# Altium PCB SMC_V1.PcbDoc
Units mil, origin at the board's own origin, x right, y up, seen from the top; angles counter-clockwise.
Board outline 5860.03 x 3310.03 mil, 2 copper layers (Top Layer, Bottom Layer); 126 components, 164 nets, 428 pads, 102 vias.
Unrouted connection lines stored in the file: 6.
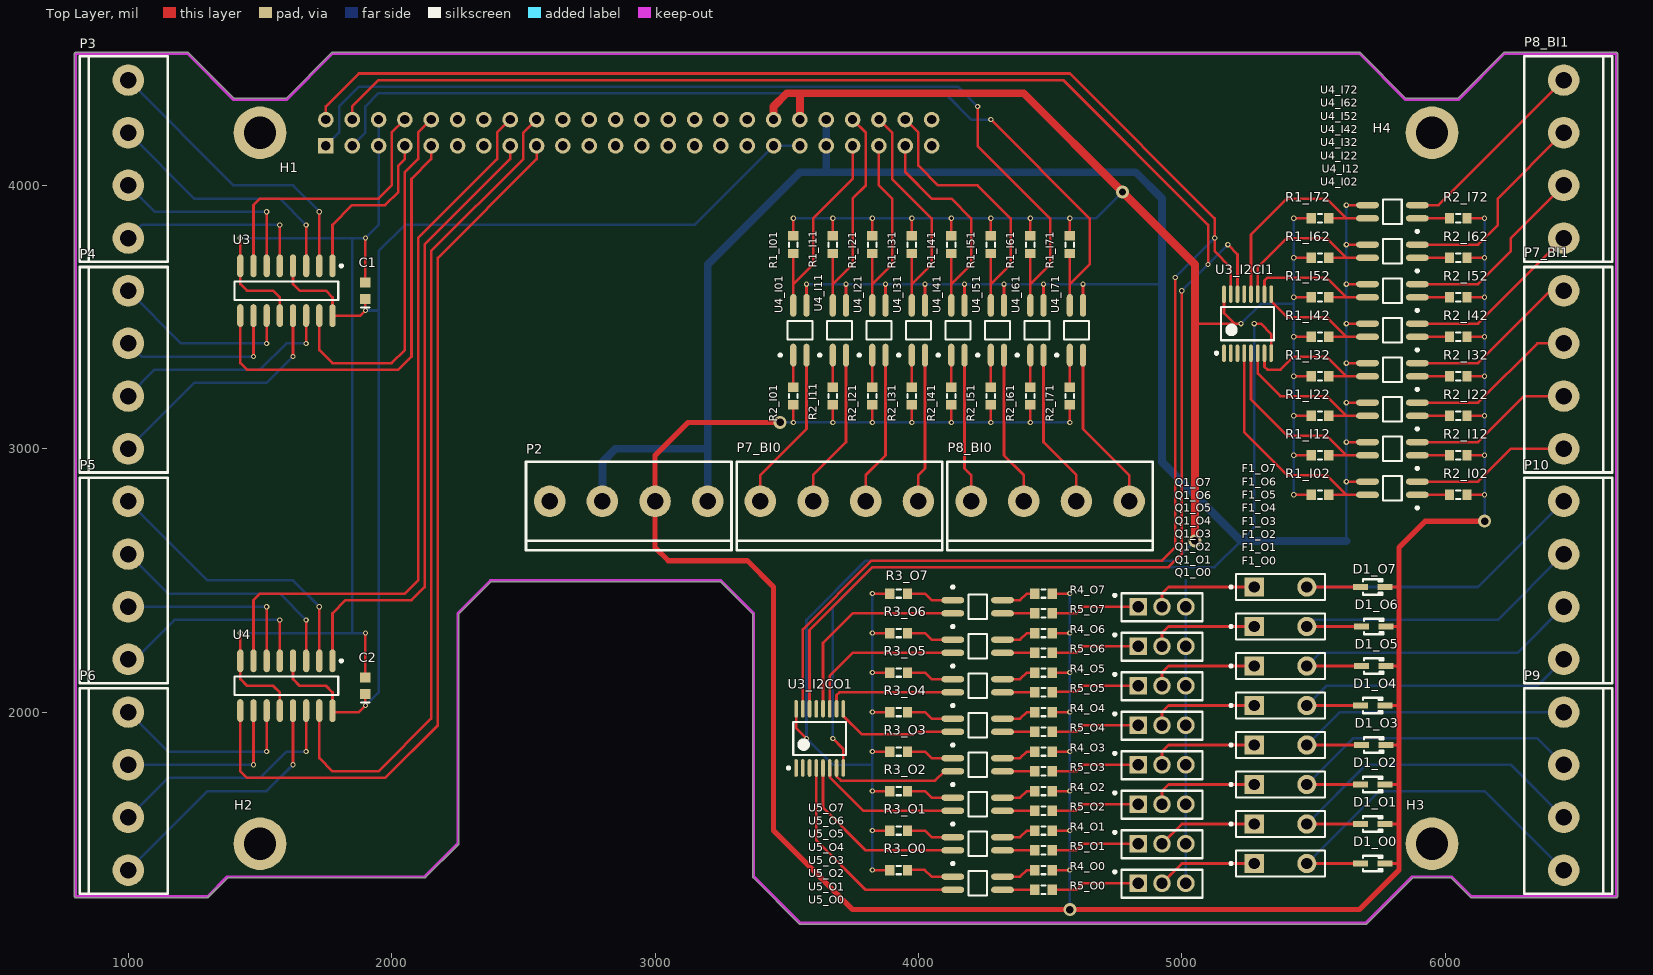
[diagram p0: Top Layer view]
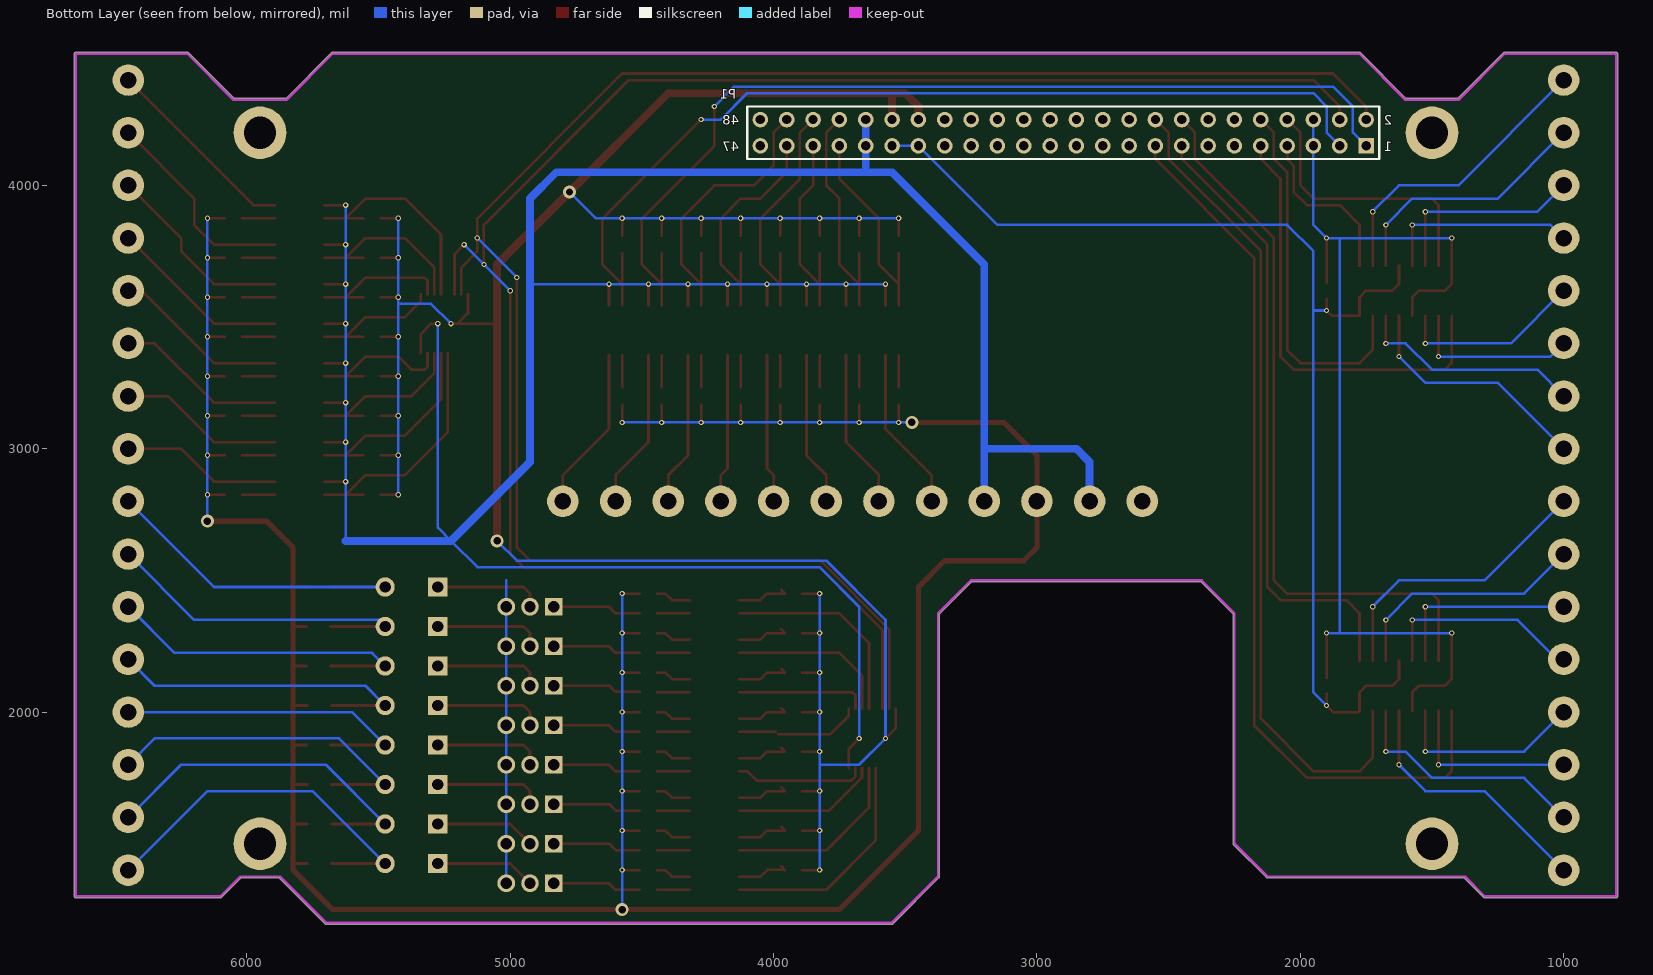
[diagram p1: Bottom Layer view, seen from below]

## Layer stack, top to bottom
Top Solder: solder mask 0.4, Solder Resist, Dk 3.5
Top Layer: signal copper 1.4
Dielectric 1: dielectric 12.6, FR-4, Dk 4.8
Bottom Layer: signal copper 1.4
Bottom Solder: solder mask 0.4, Solder Resist, Dk 3.5

## Board outline
800,1294.98 1300,1294.98 ccw(c1300,1300) 1303.56,1296.47 1303.55,1296.45 1377.08,1369.98 2125,1369.98 ccw(c2125,1375) 2128.56,1371.47 2128.55,1371.45 2253.55,1496.45 2253.53,1496.44 ccw(c2250,1500) 2255.01,1500 2255.01,2372.92 2377.08,2494.99 3247.92,2494.99 3369.99,2372.92 3369.99,1375 ccw(c3375,1375) 3371.47,1371.44 3371.45,1371.45 3546.45,1196.45 3546.44,1196.47 ccw(c3550,1200) 3550,1194.98 5700,1194.98 ccw(c5700,1200) 5703.56,1196.47 5703.55,1196.45 5877.08,1369.98 6022.92,1369.98 6096.45,1296.45 6096.44,1296.47 ccw(c6100,1300) 6100,1294.98 6650,1294.98 ccw(c6650,1300) 6655.02,1300 6655.02,4500 ccw(c6650,4500) 6650,4505.02 6225,4505.02 ccw(c6225,4500) 6221.44,4503.53 6221.45,4503.55 6047.92,4330.02 5852.08,4330.02 5678.55,4503.55 5678.56,4503.53 ccw(c5675,4500) 5675,4505.02 1775,4505.02 ccw(c1775,4500) 1771.44,4503.53 1771.45,4503.55 1597.92,4330.02 1402.08,4330.02 1228.55,4503.55 1228.56,4503.53 ccw(c1225,4500) 1225,4505.02 800,4505.02 ccw(c800,4500) 794.99,4500 794.99,1300 ccw(c800,1300)

## Design rules (kind name [scope] priority, off if disabled: settings)
Clearance [All] p1: gap=10 ignorepadtopadclearanceinfootprint=FALSE except(0: Arc-Hole Track-Hole SMDPad-Hole THPad-Hole Via-Hole Fill-Hole Poly-Hole Region-Hole Text-Hole)
PolygonConnect [All] p1: connectstyle=Relief reliefconductorwidth=10 reliefentries=4 polygonreliefangle="90 Angle" airgapwidth=10
RoutingVias [All] p1: holewidth=28 width=50 viastyle="Through Hole" minholewidth=28 minwidth=50 maxholewidth=28 maxwidth=50
SolderMaskExpansion [All] p1: expansion=4
Width [All] p1: maxlimit=50 minlimit=10 preferedwidth=10 minimp=50.000000 maximp=50.000000 favimp=50.000000
30 further rules are at their usual default settings.

## Classes and differential pairs
channel class Output: O0 O1 O2 O3 O4 O5 O6 O7
channel class Input: I01 I02 I11 I12 I21 I22 I31 I32 I41 I42 I51 I52 I61 I62 I71 I72
channel class I2CExtIO: I2CI1 I2CO1
channel class BusInput: BI0 BI1
net class MCU_X[0..7]: MCU_X0 MCU_X1 MCU_X2 MCU_X3 MCU_X4 MCU_X5 MCU_X6 MCU_X7
component class O7: D1_O7 F1_O7 Q1_O7 R3_O7 R4_O7 R5_O7 U5_O7
component class O6: D1_O6 F1_O6 Q1_O6 R3_O6 R4_O6 R5_O6 U5_O6
component class O5: D1_O5 F1_O5 Q1_O5 R3_O5 R4_O5 R5_O5 U5_O5
component class O4: D1_O4 F1_O4 Q1_O4 R3_O4 R4_O4 R5_O4 U5_O4
component class O3: D1_O3 F1_O3 Q1_O3 R3_O3 R4_O3 R5_O3 U5_O3
component class O2: D1_O2 F1_O2 Q1_O2 R3_O2 R4_O2 R5_O2 U5_O2
component class O1: D1_O1 F1_O1 Q1_O1 R3_O1 R4_O1 R5_O1 U5_O1
component class O0: D1_O0 F1_O0 Q1_O0 R3_O0 R4_O0 R5_O0 U5_O0
component class Motor: C1 C2 P3 P4 P5 P6 U3 U4
component class I72: R1_I72 R2_I72 U4_I72
component class I71: R1_I71 R2_I71 U4_I71
component class I62: R1_I62 R2_I62 U4_I62
component class I61: R1_I61 R2_I61 U4_I61
component class I52: R1_I52 R2_I52 U4_I52
component class I51: R1_I51 R2_I51 U4_I51
component class I42: R1_I42 R2_I42 U4_I42
component class I41: R1_I41 R2_I41 U4_I41
component class I32: R1_I32 R2_I32 U4_I32
component class I31: R1_I31 R2_I31 U4_I31
component class I22: R1_I22 R2_I22 U4_I22
component class I21: R1_I21 R2_I21 U4_I21
component class I12: R1_I12 R2_I12 U4_I12
component class I11: R1_I11 R2_I11 U4_I11
component class I02: R1_I02 R2_I02 U4_I02
component class I2CO1: U3_I2CO1
component class I2CI1: U3_I2CI1
component class I01: R1_I01 R2_I01 U4_I01
component class EC: H1 H2 H3 H4 P1 P2
component class BO1: P9 P10
component class BI1: P7_BI1 P8_BI1
component class BI0: P7_BI0 P8_BI0

## Components (designator, comment, footprint, x,y, rotation, side; value= is the part's Value field where it differs from the comment)
C1 "100n" CAPC1608N 1900,3600 r90 top
C2 "100n" CAPC1608N 1900,2100 r90 top
D1_O0 "1N4448" SOD323 5725,1425 r0 top (schematic designator D1)
D1_O1 "1N4448" SOD323 5725,1575 r0 top (schematic designator D1)
D1_O2 "1N4448" SOD323 5725,1725 r0 top (schematic designator D1)
D1_O3 "1N4448" SOD323 5728.74,1875 r0 top (schematic designator D1)
D1_O4 "1N4448" SOD323 5725,2025 r0 top (schematic designator D1)
D1_O5 "1N4448" SOD323 5728.74,2175 r0 top (schematic designator D1)
D1_O6 "1N4448" SOD323 5728.74,2325 r0 top (schematic designator D1)
D1_O7 "1N4448" SOD323 5725,2475 r0 top (schematic designator D1)
F1_O0 "PTC-60R075XU" SPST-60R075XU 5375,1425 r0 top (schematic designator F1)
F1_O1 "PTC-60R075XU" SPST-60R075XU 5375,1575 r0 top (schematic designator F1)
F1_O2 "PTC-60R075XU" SPST-60R075XU 5375,1725 r0 top (schematic designator F1)
F1_O3 "PTC-60R075XU" SPST-60R075XU 5375,1875 r0 top (schematic designator F1)
F1_O4 "PTC-60R075XU" SPST-60R075XU 5375,2025 r0 top (schematic designator F1)
F1_O5 "PTC-60R075XU" SPST-60R075XU 5375,2175 r0 top (schematic designator F1)
F1_O6 "PTC-60R075XU" SPST-60R075XU 5375,2325 r0 top (schematic designator F1)
F1_O7 "PTC-60R075XU" SPST-60R075XU 5375,2475 r0 top (schematic designator F1)
H1 "3.1mm" Holes 1500,4200 r0 top
H2 "3.1mm" Holes 1500,1500 r0 top
H3 "3.1mm" Holes 5950,1500 r0 top
H4 "3.1mm" Holes 5950,4200 r0 top
P1 "Header 24X2" HDR2X24 1750,4150 r0 bottom
P2 "20020106-H041A01LF" 20020106-H041A01LF 2900,2800 r0 top
P3 "20020106-H041A01LF" 20020106-H041A01LF 1000,4100 r270 top
P4 "20020106-H041A01LF" 20020106-H041A01LF 1000,3300 r270 top
P5 "20020106-H041A01LF" 20020106-H041A01LF 1000,2500 r270 top
P6 "20020106-H041A01LF" 20020106-H041A01LF 1000,1700 r270 top
P7_BI0 "20020106-H041A01LF" 20020106-H041A01LF 3700,2800 r0 top (schematic designator P7)
P7_BI1 "20020106-H041A01LF" 20020106-H041A01LF 6450,3300 r90 top (schematic designator P7)
P8_BI0 "20020106-H041A01LF" 20020106-H041A01LF 4500,2800 r0 top (schematic designator P8)
P8_BI1 "20020106-H041A01LF" 20020106-H041A01LF 6450,4100 r90 top (schematic designator P8)
P9 "20020106-H041A01LF" 20020106-H041A01LF 6450,1700 r90 top
P10 "20020106-H041A01LF" 20020106-H041A01LF 6450,2500 r90 top
Q1_O0 "BD677A" TO-126 4925,1350 r180 top (schematic designator Q1)
Q1_O1 "BD677A" TO-126 4925,1500 r180 top (schematic designator Q1)
Q1_O2 "BD677A" TO-126 4925,1650 r180 top (schematic designator Q1)
Q1_O3 "BD677A" TO-126 4925,1800 r180 top (schematic designator Q1)
Q1_O4 "BD677A" TO-126 4925,1950 r180 top (schematic designator Q1)
Q1_O5 "BD677A" TO-126 4925,2100 r180 top (schematic designator Q1)
Q1_O6 "BD677A" TO-126 4925,2250 r180 top (schematic designator Q1)
Q1_O7 "BD677A" TO-126 4925,2400 r180 top (schematic designator Q1)
R1_I01 "1k" RESC1608N 3525,3775 r270 top (schematic designator R1)
R1_I02 "1k" RESC1608N 5525,2825 r0 top (schematic designator R1)
R1_I11 "1k" RESC1608N 3675,3775 r270 top (schematic designator R1)
R1_I12 "1k" RESC1608N 5525,2975 r0 top (schematic designator R1)
R1_I21 "1k" RESC1608N 3825,3775 r270 top (schematic designator R1)
R1_I22 "1k" RESC1608N 5525,3125 r0 top (schematic designator R1)
R1_I31 "1k" RESC1608N 3975,3775 r270 top (schematic designator R1)
R1_I32 "1k" RESC1608N 5525,3275 r0 top (schematic designator R1)
R1_I41 "1k" RESC1608N 4125,3775 r270 top (schematic designator R1)
R1_I42 "1k" RESC1608N 5525,3425 r0 top (schematic designator R1)
R1_I51 "1k" RESC1608N 4275,3775 r270 top (schematic designator R1)
R1_I52 "1k" RESC1608N 5525,3575 r0 top (schematic designator R1)
R1_I61 "1k" RESC1608N 4425,3775 r270 top (schematic designator R1)
R1_I62 "1k" RESC1608N 5525,3725 r0 top (schematic designator R1)
R1_I71 "1k" RESC1608N 4575,3775 r270 top (schematic designator R1)
R1_I72 "1k" RESC1608N 5525,3875 r0 top (schematic designator R1)
R2_I01 "4.7k" RESC1608N 3525,3200 r90 top (schematic designator R2)
R2_I02 "4.7k" RESC1608N 6050,2825 r180 top (schematic designator R2)
R2_I11 "4.7k" RESC1608N 3675,3200 r90 top (schematic designator R2)
R2_I12 "4.7k" RESC1608N 6050,2975 r180 top (schematic designator R2)
R2_I21 "4.7k" RESC1608N 3825,3200 r90 top (schematic designator R2)
R2_I22 "4.7k" RESC1608N 6050,3125 r180 top (schematic designator R2)
R2_I31 "4.7k" RESC1608N 3975,3200 r90 top (schematic designator R2)
R2_I32 "4.7k" RESC1608N 6050,3275 r180 top (schematic designator R2)
R2_I41 "4.7k" RESC1608N 4125,3200 r90 top (schematic designator R2)
R2_I42 "4.7k" RESC1608N 6050,3425 r180 top (schematic designator R2)
R2_I51 "4.7k" RESC1608N 4275,3200 r90 top (schematic designator R2)
R2_I52 "4.7k" RESC1608N 6050,3575 r180 top (schematic designator R2)
R2_I61 "4.7k" RESC1608N 4425,3200 r90 top (schematic designator R2)
R2_I62 "4.7k" RESC1608N 6050,3725 r180 top (schematic designator R2)
R2_I71 "4.7k" RESC1608N 4575,3200 r90 top (schematic designator R2)
R2_I72 "4.7k" RESC1608N 6050,3875 r180 top (schematic designator R2)
R3_O0 "560R" RESC1608N 3925,1400 r0 top (schematic designator R3)
R3_O1 "560R" RESC1608N 3925,1550 r0 top (schematic designator R3)
R3_O2 "560R" RESC1608N 3925,1700 r0 top (schematic designator R3)
R3_O3 "560R" RESC1608N 3925,1850 r0 top (schematic designator R3)
R3_O4 "560R" RESC1608N 3925,2000 r0 top (schematic designator R3)
R3_O5 "560R" RESC1608N 3925,2150 r0 top (schematic designator R3)
R3_O6 "560R" RESC1608N 3925,2300 r0 top (schematic designator R3)
R3_O7 "560R" RESC1608N 3925,2450 r0 top (schematic designator R3)
R4_O0 "10k" RESC1608N 4475,1400 r180 top (schematic designator R4)
R4_O1 "10k" RESC1608N 4475,1550 r180 top (schematic designator R4)
R4_O2 "10k" RESC1608N 4475,1700 r180 top (schematic designator R4)
R4_O3 "10k" RESC1608N 4475,1850 r180 top (schematic designator R4)
R4_O4 "10k" RESC1608N 4475,2000 r180 top (schematic designator R4)
R4_O5 "10k" RESC1608N 4475,2150 r180 top (schematic designator R4)
R4_O6 "10k" RESC1608N 4475,2300 r180 top (schematic designator R4)
R4_O7 "10k" RESC1608N 4475,2450 r180 top (schematic designator R4)
R5_O0 "10k" RESC1608N 4475,1325 r0 top (schematic designator R5)
R5_O1 "10k" RESC1608N 4475,1475 r0 top (schematic designator R5)
R5_O2 "10k" RESC1608N 4475,1625 r0 top (schematic designator R5)
R5_O3 "10k" RESC1608N 4475,1775 r0 top (schematic designator R5)
R5_O4 "10k" RESC1608N 4475,1925 r0 top (schematic designator R5)
R5_O5 "10k" RESC1608N 4475,2075 r0 top (schematic designator R5)
R5_O6 "10k" RESC1608N 4475,2225 r0 top (schematic designator R5)
R5_O7 "10k" RESC1608N 4475,2375 r0 top (schematic designator R5)
U3 "AM26LS31CDR" SOIC16_N 1600,3600 r270 top (schematic designator U1)
U3_I2CI1 "PCA8574" TSSOP-ST16_N 5250,3475 r90 top (schematic designator U3)
U3_I2CO1 "PCA8574" TSSOP-ST16_N 3625,1900 r90 top (schematic designator U3)
U4 "AM26LS31CDR" SOIC16_N 1600,2100 r270 top (schematic designator U2)
U4_I01 "TLP291" SO4_N 3550,3450 r90 top (schematic designator U4)
U4_I02 "TLP291" SO4_N 5800,2850 r180 top (schematic designator U4)
U4_I11 "TLP291" SO4_N 3700,3450 r90 top (schematic designator U4)
U4_I12 "TLP291" SO4_N 5800,3000 r180 top (schematic designator U4)
U4_I21 "TLP291" SO4_N 3850,3450 r90 top (schematic designator U4)
U4_I22 "TLP291" SO4_N 5800,3150 r180 top (schematic designator U4)
U4_I31 "TLP291" SO4_N 4000,3450 r90 top (schematic designator U4)
U4_I32 "TLP291" SO4_N 5800,3300 r180 top (schematic designator U4)
U4_I41 "TLP291" SO4_N 4150,3450 r90 top (schematic designator U4)
U4_I42 "TLP291" SO4_N 5800,3450 r180 top (schematic designator U4)
U4_I51 "TLP291" SO4_N 4300,3450 r90 top (schematic designator U4)
U4_I52 "TLP291" SO4_N 5800,3600 r180 top (schematic designator U4)
U4_I61 "TLP291" SO4_N 4450,3450 r90 top (schematic designator U4)
U4_I62 "TLP291" SO4_N 5800,3750 r180 top (schematic designator U4)
U4_I71 "TLP291" SO4_N 4600,3450 r90 top (schematic designator U4)
U4_I72 "TLP291" SO4_N 5800,3900 r180 top (schematic designator U4)
U5_O0 "TLP291" SO4_N 4225,1350 r0 top (schematic designator U5)
U5_O1 "TLP291" SO4_N 4225,1500 r0 top (schematic designator U5)
U5_O2 "TLP291" SO4_N 4225,1650 r0 top (schematic designator U5)
U5_O3 "TLP291" SO4_N 4225,1800 r0 top (schematic designator U5)
U5_O4 "TLP291" SO4_N 4225,1950 r0 top (schematic designator U5)
U5_O5 "TLP291" SO4_N 4225,2100 r0 top (schematic designator U5)
U5_O6 "TLP291" SO4_N 4225,2250 r0 top (schematic designator U5)
U5_O7 "TLP291" SO4_N 4225,2400 r0 top (schematic designator U5)

## Footprints (in the part's own frame and the unit in brackets; to place one, negate y for a bottom-side part, rotate by r counter-clockwise, add the part's x,y. Pads: shape width x height; smd on the part's side, far side on the other; paste and mask are expansions set on the pad)
20020106-H041A01LF [mil] "TERM BLOCK HDR 4POS VERT 5.08MM"
  round 120 hole 62.99: 1(-300,0) 2(-100,0) 3(100,0) 4(300,0)
  silkscreen extent -390,-185 390,150, body extent -390,-185 390,150, height 287
CAPC1608N [mm] "Chip Capacitor, Body 1.6x0.8mm, IPC Medium Density"
  rect 1x1 smd: 1(-0.8,0) 2(0.8,0)
  silkscreen extent -1.6,-0.4 -1.6,0.4, body extent -0.87,-0.48 0.87,0.48, height 0.85
HDR2X24 [mm] "Connector; Header; 24x2 Position"
  rect 1.5x1.5 hole 0.9: 1(0,0)
  round 1.5 hole 0.9: 2(0,-2.54) 3(2.54,0) 4(2.54,-2.54) 5(5.08,0) 6(5.08,-2.54) 7(7.62,0) 8(7.62,-2.54) 9(10.16,0) 10(10.16,-2.54) 11(12.7,0) 12(12.7,-2.54) 13(15.24,0) 14(15.24,-2.54) 15(17.78,0) 16(17.78,-2.54) 17(20.32,0) 18(20.32,-2.54) 19(22.86,0) 20(22.86,-2.54) 21(25.4,0) 22(25.4,-2.54) 23(27.94,0) 24(27.94,-2.54) 25(30.48,0) 26(30.48,-2.54) 27(33.02,0) 28(33.02,-2.54) 29(35.56,0) 30(35.56,-2.54) 31(38.1,0) 32(38.1,-2.54) 33(40.64,0) 34(40.64,-2.54) 35(43.18,0) 36(43.18,-2.54) 37(45.72,0) 38(45.72,-2.54) 39(48.26,0) 40(48.26,-2.54) 41(50.8,0) 42(50.8,-2.54) 43(53.34,0) 44(53.34,-2.54) 45(55.88,0) 46(55.88,-2.54) 47(58.42,0) 48(58.42,-2.54)
  silkscreen extent -1.27,-3.81 59.69,1.27
Holes [mm] "Mounting Holes"
  round 5.08 hole 3.1: 0(0,0)
RESC1608N [mm] "Chip Resistor, Body 1.6x0.8mm, IPC Medium Density"
  rect 0.9x1 smd: 1(-0.85,0) 2(0.85,0)
  silkscreen extent -0.2,-0.4 0.2,0.4, body extent -0.85,-0.48 0.85,0.48, height 0.6
SO4_N [mm] "SOIC, 4-Leads, Body 4.9x3.9mm, Pitch 1.27mm, IPC Medium Density"
  oval 2.2x0.6 smd: 1(-2.4,0.635) 2(-2.4,-0.635) 3(2.4,-0.635) 4(2.4,0.635)
  silkscreen extent -2.52,-1.2 0.9,2.02, body extent -2,-1.2 2,1.2, height 1.75
SOD323 [mm] "SOD-323/SC-76; 2 Leads; Body 1.7 x 1.3 mm, (LxW)"
  rect 1.45x0.55 smd: 1(1.175,0) 2(-1.175,0)
  silkscreen extent -0.95,-0.75 0.95,0.75
SOIC16_N [mm] "SOIC, 16-Leads, Body 9.9x3.9mm, Pitch 1.27mm, IPC Medium Density"
  oval 2.2x0.6 smd: 1(-2.4,4.445) 2(-2.4,3.175) 3(-2.4,1.905) 4(-2.4,0.635) 5(-2.4,-0.635) 6(-2.4,-1.905) 7(-2.4,-3.175) 8(-2.4,-4.445) 9(2.4,-4.445) 10(2.4,-3.175) 11(2.4,-1.905) 12(2.4,-0.635) 13(2.4,0.635) 14(2.4,1.905) 15(2.4,3.175) 16(2.4,4.445)
  silkscreen extent -2.52,-5 0.9,5.42, body extent -2,-5 2,5, height 1.91
SPST-60R075XU [mm] "ª½®"
  rect 1.85x1.85 hole 1.1: 1(-2.54,0)
  round 1.85 hole 1.1: 2(2.54,0)
  silkscreen extent -4.89,-1.27 4.28,1.27, body extent -5.1,-1.55 5.1,1.55, height 15
TO-126 [mm] "TO, Thru-Hole, Vertical, Heatsink Mounted; 3 In-Line Leads; Pitch 2.29 mm"
  rect 1.7x1.7 hole 1.1: 1(2.29,0)
  round 1.7 hole 1.1: 2(0,0) 3(-2.29,0)
  silkscreen extent -3.9,-1.3 4.67,1.4, body extent -3.9,-1.3 3.9,1.4, height 19.7
TSSOP-ST16_N [mm] "TSOP, 16-Leads, Body 5x4.4mm, Pitch 0.65mm, IPC Medium Density"
  oval 1.7x0.35 smd: 1(-2.85,2.275) 2(-2.85,1.625) 3(-2.85,0.975) 4(-2.85,0.325) 5(-2.85,-0.325) 6(-2.85,-0.975) 7(-2.85,-1.625) 8(-2.85,-2.275) 9(2.85,-2.275) 10(2.85,-1.625) 11(2.85,-0.975) 12(2.85,-0.325) 13(2.85,0.325) 14(2.85,0.975) 15(2.85,1.625) 16(2.85,2.275)
  silkscreen extent -2.97,-2.55 1.6,3.12, body extent -2.25,-2.55 2.25,2.55, height 1.2

## Part data
C1 C2: library part "Capacitor SMD Cer X7R", "Capacitor SMD Cer X7R", Manufacturer 1=Kemet, Manufacturer Part Number 1=C0805C104K5RACTU, Package / Case="0805 (2012 metric)", Ratings="50V; X7R", Supplier Part Number 1=399-1170-1-ND, Tolerance=?0%, Material=ceramic, Supplier 1=Digi-Key
D1_O0 D1_O1 D1_O2 D1_O3 D1_O4 D1_O5 D1_O6 D1_O7: "SURFACE MOUNT FAST SWITCHING DIODE", Supplier Part Number 1=1N4448HWS-FDICT-ND, Supplier 1=Digi-Key
F1_O0 F1_O1 F1_O2 F1_O3 F1_O4 F1_O5 F1_O6 F1_O7: "PTC .75A 60V RESETTABLE KINK", Supplier Part Number 1=F1922-ND, LatestRevisionDate=17-Jul-2002, LatestRevisionNote="Re-released for DXP Platform.", PackageDescription="Switch; 2 Leads", PackageReference=SPST-2, Published=24-Mar-1999, Publisher="Altium Limited", Supplier 1=Digikey
H1 H2 H3 H4: library part Holes, "Mounting Holes"
P1: "Header, 24-Pin, Dual row", LatestRevisionDate=17-Jul-2002, LatestRevisionNote="Re-released for DXP Platform.", Publisher="Altium Limited"
P2 P3 P4 P5 P6 P7_BI0 P7_BI1 P8_BI0 P8_BI1 P9 P10: library part "Amphenol FCI", "TERM BLOCK HDR 4POS VERT 5.08MM"
Q1_O0 Q1_O1 Q1_O2 Q1_O3 Q1_O4 Q1_O5 Q1_O6 Q1_O7: "Bipolar (BJT) Transistor NPN - Darlington 60V 4A 40W Through Hole SOT-32-3", Supplier Part Number 1=497-2600-5-ND, Supplier 1=Digi-Key
R1_I01 R1_I02 R1_I11 R1_I12 R1_I21 R1_I22 R1_I31 R1_I32 R1_I41 R1_I42 R1_I51 R1_I52 R1_I61 R1_I62 R1_I71 R1_I72 R2_I01 R2_I02 R2_I11 R2_I12 R2_I21 R2_I22 R2_I31 R2_I32 R2_I41 R2_I42 R2_I51 R2_I52 R2_I61 R2_I62 R2_I71 R2_I72 R3_O0 R3_O1 R3_O2 R3_O3 R3_O4 R3_O5 R3_O6 R3_O7 R4_O0 R4_O1 R4_O2 R4_O3 R4_O4 R4_O5 R4_O6 R4_O7 R5_O0 R5_O1 R5_O2 R5_O3 R5_O4 R5_O5 R5_O6 R5_O7: library part "Resistor SMD chip", "Resistor SMD chip", Manufacturer 1=Yageo, Manufacturer Part Number 1=RC0805JR-0710KL, Package / Case="0805 (2012 metric)", Ratings="1/8 W", Supplier Part Number 1=311-10KARCT-ND, Tolerance=?%, Material="Thick Film", Supplier 1=Digi-Key
U3 U4: library part AM26LS31C, "IC QUAD DIFF LINE DRIVER 16-SOIC"
U3_I2CI1 U3_I2CO1: "Remote 8-bit I/O expander for I2C-bus with interrupt", Supplier Part Number 1=568-4241-5-ND, Supplier 1=Digi-Key
U4_I01 U4_I02 U4_I11 U4_I12 U4_I21 U4_I22 U4_I31 U4_I32 U4_I41 U4_I42 U4_I51 U4_I52 U4_I61 U4_I62 U4_I71 U4_I72 U5_O0 U5_O1 U5_O2 U5_O3 U5_O4 U5_O5 U5_O6 U5_O7: "Optoisolator Transistor Output 3750Vrms 1 Channel 4-SO"

## Via types
v1: diameter 20, hole 12, Top Layer to Bottom Layer, 97 vias
v2: diameter 50, hole 28, Top Layer to Bottom Layer, 4 vias
v3: diameter 50, hole 28, Top Layer to Bottom Layer, tented top, 1 vias

## Nets (pads, with @x,y where several pads share a name; then routed paths per layer and width w, separated by ;. In a path a pad name is that pad's centre, name@x,y a point inside that pad or via, vN(x,y) a via of type N, cw(c..) or ccw(c..) an arc to the next point about the centre after c; other vN are vias at no path point)
3V3: P1.36 P1.38 R1_I01.1 R1_I02.1 R1_I11.1 R1_I12.1 R1_I21.1 R1_I22.1 R1_I31.1 R1_I32.1 R1_I41.1 R1_I42.1 R1_I51.1 R1_I52.1 R1_I61.1 R1_I62.1 R1_I71.1 R1_I72.1 R3_O0.1 R3_O1.1 R3_O2.1 R3_O3.1 R3_O4.1 R3_O5.1 R3_O6.1 R3_O7.1 U3_I2CI1.16 U3_I2CO1.16 | length 11082.2
  Top Layer w10: R1_I01.1 v1(3525,3875) ; U3_I2CO1.16 3535.43,1939.57 v1(3575,1900) ; R1_I11.1 v1(3675,3875) ; v1(3825,1400) R3_O0.1 ; v1(3825,1550) R3_O1.1 ; v1(3825,1700) R3_O2.1 ; v1(3825,1850) R3_O3.1 ; v1(3825,2000) R3_O4.1 ; v1(3825,2150) R3_O5.1 ; v1(3825,2300) R3_O6.1 ; v1(3825,2450) R3_O7.1 ; R1_I21.1 v1(3825,3875) ; R1_I31.1 v1(3975,3875) ; R1_I41.1 v1(4125,3875) ; R1_I51.1 v1(4275,3875) ; R1_I61.1 v1(4425,3875) ; R1_I71.1 v1(4575,3875) ; 5050,3475 5200,3475 ; U3_I2CI1.16 5160.43,3514.57 5200,3475 ; v1(5225,3475) 5200,3475 ; v1(5425,2825) R1_I02.1 ; v1(5425,2975) R1_I12.1 ; v1(5425,3125) R1_I22.1 ; v1(5425,3275) R1_I32.1 ; v1(5425,3425) R1_I42.1 ; v1(5425,3575) R1_I52.1 ; v1(5425,3725) R1_I62.1 ; v1(5425,3875) R1_I72.1
  Top Layer w30: P1.36 3450,4300 3500,4350 3550,4350 ; P1.38 3550,4350 ; v3(5050,2650) 5050,3475 5050,3700 v2(4775,3975) 4400,4350 3550,4350
  Bottom Layer w10: v1(3525,3875) v1(3675,3875) v1(3825,3875) v1(3975,3875) v1(4125,3875) v1(4275,3875) v1(4425,3875) v1(4575,3875) 4675,3875 v2(4775,3975) ; v1(3825,1400) v1(3825,1550) v1(3825,1700) 3825,1800 ; v1(3825,2450) v1(3825,2300) v1(3825,2150) v1(3825,2000) v1(3825,1850) 3825,1800 ; v3(5050,2650) 4975,2575 3800,2575 3575,2350 v1(3575,1900) 3675,1800 3825,1800 ; v1(5225,3475) 5300,3550 5425,3550 ; v1(5425,2825) v1(5425,2975) v1(5425,3125) v1(5425,3275) v1(5425,3425) 5425,3550 ; v1(5425,3875) v1(5425,3725) v1(5425,3575) 5425,3550
24V: P2.1
A_CP: P1.17 U4.9 | length 3429
  Top Layer w10: U4.9 1425,1775 1450,1750 1975,1750 2175,1950 2175,3725 2550,4100 P1.17
A_CP+: P6.1 U4.11 | length 742.6
  Top Layer w10: v1(1525,1850) U4.11
  Bottom Layer w10: P6.1 1150,1850 v1(1525,1850)
A_CP-: P6.2 U4.10 | length 680.5
  Top Layer w10: v1(1475,1800) U4.10
  Bottom Layer w10: P6.2 v1(1475,1800)
A_DIR: P1.18 U4.15 | length 3149.8
  Top Layer w10: U4.15 1725,1825 1775,1775 1950,1775 2150,1975 2150,3750 2500,4100 2500,4200 P1.18
A_DIR+: P6.3 U4.14 | length 934.1
  Top Layer w10: v1(1675,1850) U4.14
  Bottom Layer w10: P6.3 1150,1750 1500,1750 1600,1850 v1(1675,1850)
A_DIR-: P6.4 U4.13 | length 996.2
  Top Layer w10: v1(1625,1800) U4.13
  Bottom Layer w10: P6.4 1300,1700 1525,1700 v1(1625,1800)
AD0_I2CI1: U3_I2CI1.1
AD0_I2CO1: U3_I2CO1.1
AD1_I2CI1: U3_I2CI1.2
AD1_I2CO1: U3_I2CO1.2
AD2_I2CI1: U3_I2CI1.3
AD2_I2CO1: U3_I2CO1.3
AGND: Q1_O0.3 Q1_O1.3 Q1_O2.3 Q1_O3.3 Q1_O4.3 Q1_O5.3 Q1_O6.3 Q1_O7.3 | length 1150
  Bottom Layer w10: Q1_O0.3 Q1_O1.3 Q1_O2.3 Q1_O4.3 Q1_O5.3 Q1_O6.3 5015.16,2500
AVCC: D1_O0.1 D1_O1.1 D1_O2.1 D1_O3.1 D1_O4.1 D1_O5.1 D1_O6.1 D1_O7.1 P2.3 R2_I01.1 R2_I02.1 R2_I11.1 R2_I12.1 R2_I21.1 R2_I22.1 R2_I31.1 R2_I32.1 R2_I41.1 R2_I42.1 R2_I51.1 R2_I52.1 R2_I61.1 R2_I62.1 R2_I71.1 R2_I72.1 R4_O0.1 R4_O1.1 R4_O2.1 R4_O3.1 R4_O4.1 R4_O5.1 R4_O6.1 R4_O7.1 | length 11932.3
  Top Layer w10: v1(3525,3100) R2_I01.1 ; v1(3675,3100) R2_I11.1 ; v1(3825,3100) R2_I21.1 ; v1(3975,3100) R2_I31.1 ; v1(4125,3100) R2_I41.1 ; v1(4275,3100) R2_I51.1 ; v1(4425,3100) R2_I61.1 ; R4_O0.1 v1(4575,1400) ; R4_O1.1 v1(4575,1550) ; R4_O2.1 v1(4575,1700) ; R4_O3.1 v1(4575,1850) ; R4_O4.1 v1(4575,2000) ; R4_O5.1 v1(4575,2150) ; R4_O6.1 v1(4575,2300) ; R4_O7.1 v1(4575,2450) ; v1(4575,3100) R2_I71.1 ; D1_O0.1 5825,1425 ; D1_O1.1 5825,1575 ; D1_O2.1 5825,1725 ; D1_O4.1 5825,2025 ; D1_O7.1 5825,2475 ; D1_O3.1 5825,1875 ; D1_O5.1 5825,2175 ; D1_O6.1 5825,2325 ; R2_I02.1 v1(6150,2825) ; R2_I12.1 v1(6150,2975) ; R2_I22.1 v1(6150,3125) ; R2_I32.1 v1(6150,3275) ; R2_I42.1 v1(6150,3425) ; R2_I52.1 v1(6150,3575) ; R2_I62.1 v1(6150,3725) ; R2_I72.1 v1(6150,3875)
  Top Layer w20: v2(3475,3100) 3125,3100 3000,2975 P2.3 3000,2625 3050,2575 3350,2575 3450,2475 3450,1550 3750,1250 v2(4575,1250) 5675,1250 5825,1400 5825,1425 5825,1575 5825,1725 5825,1875 5825,2025 5825,2175 5825,2325 5825,2475 5825,2625 5925,2725 v2(6150,2725)
  Bottom Layer w10: v2(3475,3100) v1(3525,3100) v1(3675,3100) v1(3825,3100) v1(3975,3100) v1(4125,3100) v1(4275,3100) v1(4425,3100) v1(4575,3100) ; v2(4575,1250) v1(4575,1400) v1(4575,1550) v1(4575,1700) v1(4575,1850) v1(4575,2000) v1(4575,2150) v1(4575,2300) v1(4575,2450) ; v2(6150,2725) v1(6150,2825) v1(6150,2975) v1(6150,3125) v1(6150,3275) v1(6150,3425) v1(6150,3575) v1(6150,3725) v1(6150,3875)
EXT_IO0_I2CI1: R1_I02.2 U3_I2CI1.4 U4_I02.4 | length 933.3
  Top Layer w10: U3_I2CI1.4 5237.2,3062.8 5400,2900 5550,2900 5625,2825 ; R1_I02.2 5625,2825 ; U4_I02.4 5625,2825
EXT_IO1_I2CI1: R1_I12.2 U3_I2CI1.5 U4_I12.4 | length 772.7
  Top Layer w10: U3_I2CI1.5 5262.8,3187.2 5400,3050 5550,3050 5625,2975 ; R1_I12.2 5625,2975 ; U4_I12.4 5625,2975
EXT_IO2_I2CI1: R1_I22.2 U3_I2CI1.6 U4_I22.4 | length 626.5
  Top Layer w10: U3_I2CI1.6@5289.11,3362.8 5289.11,3285.89 5375,3200 5550,3200 5625,3125 ; R1_I22.2 5625,3125 ; U4_I22.4 5625,3125
EXT_IO3_I2CI1: R1_I32.2 U3_I2CI1.7 U4_I32.4 | length 566.2
  Top Layer w10: U3_I2CI1.7 5313.98,3311.02 5325,3300 5375,3300 5425,3350 5550,3350 5625,3275 ; R1_I32.2 5625,3275 ; U4_I32.4 5625,3275
EXT_IO4_I2CI1: R1_I42.2 U3_I2CI1.9 U4_I42.4 | length 515.4
  Top Layer w10: U3_I2CI1.9 5339.57,3560.43 5400,3500 5550,3500 5625,3425 ; R1_I42.2 5625,3425 ; U4_I42.4 5625,3425
EXT_IO5_I2CI1: R1_I52.2 U3_I2CI1.10 U4_I52.4 | length 545.5
  Top Layer w10: U3_I2CI1.10 5313.98,3638.98 5325,3650 5550,3650 5625,3575 ; R1_I52.2 5625,3575 ; U4_I52.4 5625,3575
EXT_IO6_I2CI1: R1_I62.2 U3_I2CI1.11 U4_I62.4 | length 664.1
  Top Layer w10: U3_I2CI1.11 5288.39,3688.39 5400,3800 5550,3800 5625,3725 ; R1_I62.2@5558.46,3723.03 R1_I62.2 5625,3725 ; U4_I62.4 5625,3725
EXT_IO7_I2CI1: R1_I72.2 U3_I2CI1.12 U4_I72.4 | length 824.7
  Top Layer w10: U3_I2CI1.12 5262.8,3812.8 5400,3950 5550,3950 5625,3875 ; R1_I72.2@5558.46,3873.03 R1_I72.2 5625,3875 ; U4_I72.4 5625,3875
EXT_RST_IN: P1.27
EXT_RST_OUT: P1.28
EXT_VIN: C1.1 C2.1 P1.35 P1.37 U3.4 U3.16 U4.4 U4.16 | length 4538.5
  Top Layer w10: U4.4 1625,2125 1650,2100 1750,2100 1775,2075 U4.16 1780.51,2000 1875,2000 v1(1900,2025) C2.1 ; U3.4 1625,3625 1650,3600 1750,3600 1775,3575 U3.16 1880.51,3505.51 v1(1900,3525) C1.1
  Bottom Layer w10: v1(1900,2025) 1950,2075 1950,3525 ; v1(1900,3525) 1950,3525 ; P1.37 P1.35 3150,3850 2050,3850 1950,3750 1950,3525
GND: C1.2 C2.2 H1.0 H2.0 H3.0 H4.0 P1.5 P1.6 P1.39 P1.40 P2.2 P2.4 U3.8 U3.12 U3_I2CI1.8 U3_I2CO1.8 U4.8 U4.12 U4_I01.3 U4_I02.3 U4_I11.3 U4_I12.3 U4_I21.3 U4_I22.3 U4_I31.3 U4_I32.3 U4_I41.3 U4_I42.3 U4_I51.3 U4_I52.3 U4_I61.3 U4_I62.3 U4_I71.3 U4_I72.3 | length 16689.1
  Top Layer w10: v1(1425,2300) U4.8 1425,2125 1450,2100 1550,2100 1575,2075 U4.12 ; v1(1425,3800) U3.8 1425,3625 1450,3600 1550,3600 1575,3575 U3.12 ; C2.2 v1(1900,2300) ; C1.2 v1(1900,3800) ; U4_I01.3 v1(3575,3625) ; v1(3675,1900) 3714.57,1860.43 U3_I2CO1.8 ; U4_I11.3 v1(3725,3625) ; U4_I21.3 v1(3875,3625) ; U4_I31.3 v1(4025,3625) ; U4_I41.3 v1(4175,3625) ; U4_I51.3 v1(4325,3625) ; U4_I61.3 v1(4475,3625) ; U4_I71.3 v1(4625,3625) ; v1(5275,3475) 5300,3475 5339.57,3435.43 U3_I2CI1.8 ; v1(5625,2875) U4_I02.3 ; v1(5625,3025) U4_I12.3 ; v1(5625,3175) U4_I22.3 ; v1(5625,3325) U4_I32.3 ; v1(5625,3475) U4_I42.3 ; v1(5625,3625) U4_I52.3 ; v1(5625,3775) U4_I62.3 ; v1(5625,3925) U4_I72.3
  Bottom Layer w10: v1(1425,2300) 1850,2300 ; v1(1425,3800) 1850,3800 ; v1(1900,2300) 1850,2300 ; P1.6 P1.5 1950,3850 v1(1900,3800) 1850,3800 ; v1(3575,3625) v1(3725,3625) v1(3875,3625) v1(4025,3625) v1(4175,3625) v1(4325,3625) v1(4475,3625) v1(4625,3625) 4925,3625 ; v1(3675,1900) 3675,2400 3825,2550 5125,2550 5225,2650 5275,2700 v1(5275,3475) ; 5625,2650 v1(5625,2875) v1(5625,3025) v1(5625,3175) v1(5625,3325) v1(5625,3475) v1(5625,3625) v1(5625,3775) v1(5625,3925) ; 1850,2300 1850,3800
  Bottom Layer w30: P2.2 2800,2950 2850,3000 3200,3000 ; P2.4 3200,3000 ; P1.40 P1.39 3650,4050 ; 5625,2650 5225,2650 4925,2950 4925,3625 4925,3950 4825,4050 3650,4050 ; 3200,3000 3200,3700 3550,4050 3650,4050
HDK_MBED_RX: P1.26
HDK_MBED_TX: P1.25
I2C1_SCL: P1.4 U3_I2CI1.14 U3_I2CO1.14 | length 7001.9
  Top Layer w10: P1.4 1850,4300 1950,4400 4550,4400 5100,3850 v1(5100,3700) ; U3_I2CO1.14 3586.61,2311.61 3825,2550 4950,2550 5000,2600 v1(5000,3600) ; v1(5175,3775) 5211.61,3738.39 U3_I2CI1.14
  Bottom Layer w10: v1(5000,3600) v1(5100,3700) v1(5175,3775)
I2C1_SDA: P1.2 U3_I2CI1.15 U3_I2CO1.15 | length 7099.6
  Top Layer w10: P1.2 1750,4300 1875,4425 4575,4425 5125,3875 v1(5125,3800) 5125,3750 5186.02,3688.98 U3_I2CI1.15 ; U3_I2CO1.15 3561.02,2314.31 3821.72,2575 4925,2575 4975,2625 v1(4975,3650)
  Bottom Layer w10: v1(4975,3650) v1(5125,3800)
I2C_INT_I2CI1: U3_I2CI1.13
I2C_INT_I2CO1: U3_I2CO1.13
MCU_X0: P1.41 R1_I01.2 U4_I01.4 | length 815.2
  Top Layer w10: U4_I01.4 3525,3625 ; R1_I01.2 3525,3625 ; P1.41 3750,4025 3600,3875 3600,3700 3525,3625
MCU_X1: P1.42 R1_I11.2 U4_I11.4 | length 894.5
  Top Layer w10: U4_I11.4 3675,3625 ; R1_I11.2 3675,3625 ; P1.42 3800,4200 3800,4000 3750,3950 3750,3700 3675,3625
MCU_X2: P1.43 R1_I21.2 U4_I21.4 | length 773.8
  Top Layer w10: U4_I21.4 3825,3625 ; R1_I21.2 3825,3625 ; P1.43 3850,4000 3900,3950 3900,3700 3825,3625
MCU_X3: P1.44 R1_I31.2 U4_I31.4 | length 936
  Top Layer w10: P1.44 3900,4200 3900,4025 4050,3875 4050,3700 3975,3625 ; U4_I31.4 3975,3625 ; R1_I31.2 3975,3625
MCU_X4: P1.45 R1_I41.2 U4_I41.4 | length 900.6
  Top Layer w10: P1.45 3950,4050 4050,3950 4125,3950 4200,3875 4200,3700 4125,3625 ; U4_I41.4 4125,3625 ; R1_I41.2 4125,3625
MCU_X5: P1.46 R1_I51.2 U4_I51.4 | length 1106.7
  Top Layer w10: P1.46 4000,4200 4000,4075 4075,4000 4225,4000 4350,3875 4350,3700 4275,3625 ; U4_I51.4 4275,3625 ; R1_I51.2 4275,3625
MCU_X6: P1.1 R1_I61.2 U4_I61.4 | length 3674.9
  Top Layer w10: v1(4225,4300) 4225,4150 4500,3875 4500,3700 4425,3625 ; U4_I61.4 4425,3625 ; R1_I61.2 4425,3625
  Bottom Layer w10: P1.1 1800,4200 1800,4300 1875,4375 4150,4375 v1(4225,4300)
MCU_X7: P1.3 R1_I71.2 U4_I71.4 | length 3616.3
  Top Layer w10: v1(4275,4250) 4650,3875 4650,3700 4575,3625 ; U4_I71.4 4575,3625 ; R1_I71.2 4575,3625
  Bottom Layer w10: P1.3 1900,4200 1900,4300 1950,4350 4100,4350 4200,4250 v1(4275,4250)
MCU_Y0: U3_I2CO1.4 U5_O0.2 | length 871.1
  Top Layer w10: U3_I2CO1.4 3612.2,1512.8 3800,1325 U5_O0.2
MCU_Y1: U3_I2CO1.5 U5_O1.2 | length 710.5
  Top Layer w10: U3_I2CO1.5 3637.8,1637.2 3800,1475 U5_O1.2
MCU_Y2: U3_I2CO1.6 U5_O2.2 | length 554.8
  Top Layer w10: U3_I2CO1.6 3664.11,1787.07 3664.11,1752.44 3791.55,1625 U5_O2.2
MCU_Y3: U3_I2CO1.7 U5_O3.2 | length 495.1
  Top Layer w10: U3_I2CO1.7 3689.7,1787.07 3689.7,1755.13 3705.5,1739.33 4063.35,1739.33 4099.02,1775 U5_O3.2
MCU_Y4: U3_I2CO1.9 U5_O4.2 | length 462
  Top Layer w10: U3_I2CO1.9 3714.57,1985.63 3784.88,1915.32 3982.39,1915.32 ; 3992.08,1925 U5_O4.2
MCU_Y5: U3_I2CO1.10 U5_O5.2 | length 497.9
  Top Layer w10: U3_I2CO1.10 3688.98,2063.98 3700,2075 U5_O5.2
MCU_Y6: U3_I2CO1.11 U5_O6.2 | length 629.2
  Top Layer w10: U3_I2CO1.11 3663.39,2138.39 3750,2225 U5_O6.2
MCU_Y7: U3_I2CO1.12 U5_O7.2 | length 828.1
  Top Layer w10: 3638.52,2050.26 3638.52,2012.93 U3_I2CO1.12 3637.8,2262.8 3750,2375 U5_O7.2
NetF1_O0_1: F1_O0.1 Q1_O0.2 | length 381.1
  Top Layer w10: Q1_O0.2 5000,1425 F1_O0.1
NetF1_O1_1: F1_O1.1 Q1_O1.2 | length 381.1
  Top Layer w10: Q1_O1.2 5000,1575 F1_O1.1
NetF1_O2_1: F1_O2.1 Q1_O2.2 | length 410.4
  Top Layer w10: Q1_O2.2 4925,1700 4950,1725 F1_O2.1
NetF1_O3_1: F1_O3.1 Q1_O3.2 | length 410.4
  Top Layer w10: Q1_O3.2 4925,1850 4950,1875 F1_O3.1
NetF1_O4_1: F1_O4.1 Q1_O4.2 | length 410.4
  Top Layer w10: Q1_O4.2 4925,2000 4950,2025 F1_O4.1
NetF1_O5_1: F1_O5.1 Q1_O5.2 | length 410.4
  Top Layer w10: Q1_O5.2 4925,2150 4950,2175 F1_O5.1
NetF1_O6_1: F1_O6.1 Q1_O6.2 | length 410.4
  Top Layer w10: Q1_O6.2 4925,2300 4950,2325 F1_O6.1
NetF1_O7_1: F1_O7.1 Q1_O7.2 | length 410.4
  Top Layer w10: Q1_O7.2 4925,2450 4950,2475 F1_O7.1
NetQ1_O0_1: Q1_O0.1 R5_O0.2 | length 336.7
  Top Layer w10: R5_O0.2 4600,1325 4625,1350 Q1_O0.1
NetQ1_O1_1: Q1_O1.1 R5_O1.2 | length 336.7
  Top Layer w10: R5_O1.2 4598.03,1475 4623.03,1500 Q1_O1.1
NetQ1_O2_1: Q1_O2.1 R5_O2.2 | length 336.7
  Top Layer w10: R5_O2.2 4598.03,1625 4623.03,1650 Q1_O2.1
NetQ1_O3_1: Q1_O3.1 R5_O3.2 | length 336.7
  Top Layer w10: R5_O3.2 4600,1775 4625,1800 Q1_O3.1
NetQ1_O4_1: Q1_O4.1 R5_O4.2 | length 336.7
  Top Layer w10: R5_O4.2 4600,1925 4625,1950 Q1_O4.1
NetQ1_O5_1: Q1_O5.1 R5_O5.2 | length 337.9
  Top Layer w10: R5_O5.2 4508.46,2076.97 4600,2076.97 4623.03,2100 Q1_O5.1
NetQ1_O6_1: Q1_O6.1 R5_O6.2 | length 336.7
  Top Layer w10: R5_O6.2 4600,2225 4625,2250 Q1_O6.1
NetQ1_O7_1: Q1_O7.1 R5_O7.2 | length 336.7
  Top Layer w10: R5_O7.2 4600,2375 4625,2400 Q1_O7.1
NetR2_I01_2: R2_I01.2 U4_I01.1 | length 122
  Top Layer w10: R2_I01.2 U4_I01.1
NetR2_I02_2: R2_I02.2 U4_I02.1 | length 122
  Top Layer w10: U4_I02.1 R2_I02.2
NetR2_I11_2: R2_I11.2 U4_I11.1 | length 122
  Top Layer w10: R2_I11.2 U4_I11.1
NetR2_I12_2: R2_I12.2 U4_I12.1 | length 122
  Top Layer w10: U4_I12.1 R2_I12.2
NetR2_I21_2: R2_I21.2 U4_I21.1 | length 122
  Top Layer w10: R2_I21.2 U4_I21.1
NetR2_I22_2: R2_I22.2 U4_I22.1 | length 122
  Top Layer w10: U4_I22.1 R2_I22.2
NetR2_I31_2: R2_I31.2 U4_I31.1 | length 122
  Top Layer w10: R2_I31.2 U4_I31.1
NetR2_I32_2: R2_I32.2 U4_I32.1 | length 122
  Top Layer w10: U4_I32.1 R2_I32.2
NetR2_I41_2: R2_I41.2 U4_I41.1 | length 122
  Top Layer w10: R2_I41.2 U4_I41.1
NetR2_I42_2: R2_I42.2 U4_I42.1 | length 122
  Top Layer w10: U4_I42.1 R2_I42.2
NetR2_I51_2: R2_I51.2 U4_I51.1 | length 122
  Top Layer w10: R2_I51.2 U4_I51.1
NetR2_I52_2: R2_I52.2 U4_I52.1 | length 122
  Top Layer w10: U4_I52.1 R2_I52.2
NetR2_I61_2: R2_I61.2 U4_I61.1 | length 122
  Top Layer w10: R2_I61.2 U4_I61.1
NetR2_I62_2: R2_I62.2 U4_I62.1 | length 122
  Top Layer w10: U4_I62.1 R2_I62.2
NetR2_I71_2: R2_I71.2 U4_I71.1 | length 122
  Top Layer w10: R2_I71.2 U4_I71.1
NetR2_I72_2: R2_I72.2 U4_I72.1 | length 122
  Top Layer w10: U4_I72.1 R2_I72.2
NetR3_O0_2: R3_O0.2 U5_O0.1 | length 203.2
  Top Layer w10: R3_O0.2 R3_O0.2@3958.46,1401.97 ; R3_O0.2@3971.18,1414.68 R3_O0.2@3958.46,1401.97 ; U5_O0.1 4050,1375 4024.02,1400.98 3959.45,1400.98 R3_O0.2@3958.46,1401.97
NetR3_O1_2: R3_O1.2 U5_O1.1 | length 202.4
  Top Layer w10: R3_O1.2@3971.18,1564.68 3958.46,1551.97 R3_O1.2 4025,1550 4050,1525 U5_O1.1
NetR3_O2_2: R3_O2.2 U5_O2.1 | length 202.4
  Top Layer w10: R3_O2.2@3971.18,1714.68 3958.46,1701.97 R3_O2.2 4025,1700 4050,1675 U5_O2.1
NetR3_O3_2: R3_O3.2 U5_O3.1 | length 202.4
  Top Layer w10: R3_O3.2@3971.18,1864.68 3958.46,1851.97 R3_O3.2 4025,1850 4050,1825 U5_O3.1
NetR3_O4_2: R3_O4.2 U5_O4.1 | length 202.4
  Top Layer w10: R3_O4.2@3971.18,2014.68 3958.46,2001.97 R3_O4.2 4025,2000 4050,1975 U5_O4.1
NetR3_O5_2: R3_O5.2 U5_O5.1 | length 202.4
  Top Layer w10: R3_O5.2@3971.18,2164.68 3958.46,2151.97 R3_O5.2 4025,2150 4050,2125 U5_O5.1
NetR3_O6_2: R3_O6.2 U5_O6.1 | length 202.4
  Top Layer w10: R3_O6.2@3971.18,2314.68 3958.46,2301.97 R3_O6.2 4025,2300 4050,2275 U5_O6.1
NetR3_O7_2: R3_O7.2 U5_O7.1 | length 202.4
  Top Layer w10: R3_O7.2@3971.18,2464.68 3958.46,2451.97 R3_O7.2 4025,2450 4050,2425 U5_O7.1
NetR4_O0_2: R4_O0.2 U5_O0.4 | length 132.4
  Top Layer w10: U5_O0.4 4386.59,1375 4411.59,1400 R4_O0.2
NetR4_O1_2: R4_O1.2 U5_O1.4 | length 132.4
  Top Layer w10: U5_O1.4 4386.59,1525 4411.59,1550 R4_O1.2
NetR4_O2_2: R4_O2.2 U5_O2.4 | length 132.4
  Top Layer w10: U5_O2.4 4386.59,1675 4411.59,1700 R4_O2.2
NetR4_O3_2: R4_O3.2 U5_O3.4 | length 132.4
  Top Layer w10: U5_O3.4 4386.59,1825 4411.59,1850 R4_O3.2
NetR4_O4_2: R4_O4.2 U5_O4.4 | length 132.4
  Top Layer w10: U5_O4.4 4386.59,1975 4411.59,2000 R4_O4.2
NetR4_O5_2: R4_O5.2 U5_O5.4 | length 132.4
  Top Layer w10: U5_O5.4 4386.59,2125 4411.59,2150 R4_O5.2
NetR4_O6_2: R4_O6.2 U5_O6.4 | length 132.4
  Top Layer w10: U5_O6.4 4386.59,2275 4411.59,2300 R4_O6.2
NetR4_O7_2: R4_O7.2 U5_O7.4 | length 132.4
  Top Layer w10: U5_O7.4 4386.59,2425 4411.59,2450 R4_O7.2
NetR5_O0_1: R5_O0.1 U5_O0.3 | length 122
  Top Layer w10: U5_O0.3 R5_O0.1
NetR5_O1_1: R5_O1.1 U5_O1.3 | length 122
  Top Layer w10: U5_O1.3 R5_O1.1
NetR5_O2_1: R5_O2.1 U5_O2.3 | length 122
  Top Layer w10: U5_O2.3 R5_O2.1
NetR5_O3_1: R5_O3.1 U5_O3.3 | length 122
  Top Layer w10: U5_O3.3 R5_O3.1
NetR5_O4_1: R5_O4.1 U5_O4.3 | length 122
  Top Layer w10: U5_O4.3 R5_O4.1
NetR5_O5_1: R5_O5.1 U5_O5.3 | length 122
  Top Layer w10: U5_O5.3 R5_O5.1
NetR5_O6_1: R5_O6.1 U5_O6.3 | length 122
  Top Layer w10: U5_O6.3 R5_O6.1
NetR5_O7_1: R5_O7.1 U5_O7.3 | length 122
  Top Layer w10: U5_O7.3 R5_O7.1
P0.0: P1.12
P0.1: P1.13
P0.21: P1.11
P0.25-AD_IN2: P1.29
P0.26-AD_IN3-DAC: P1.30
P1.19: P1.10 U3.15 | length 1413.4
  Top Layer w10: U3.15 1725,3375 1775,3325 2000,3325 2050,3375 2050,4050 2100,4100 2100,4200 P1.10
P1.20: P1.9 U3.9 | length 1692.6
  Top Layer w10: U3.9 1425,3325 1450,3300 2025,3300 2075,3350 2075,4025 2150,4100 P1.9
P1.23: P1.8 U3.7 | length 1057.3
  Top Layer w10: U3.7 1475,3925 1500,3950 1950,3950 2000,4000 2000,4200 P1.8
P1.24: P1.7 U3.1 | length 642.6
  Top Layer w10: U3.1 1775,3850 1850,3925 1975,3925 2025,3975 2025,4075 2050,4100 P1.7
P2.10-ISP_EN: P1.14
P2.22-SPI_SCK_TP: P1.20
P2.23-SPI_SSEL_TP: P1.21
P2.25-IRQ_TP: P1.22
P2.26-SPI_MISO_TP: P1.23
P2.27-SPI_MOSI_TP: P1.24
P5.0: P1.15 U4.1 | length 2381.6
  Top Layer w10: U4.1 1775,2375 1825,2425 2075,2425 2125,2475 2125,3775 2450,4100 P1.15
P5.1: P1.16 U4.7 | length 2781.6
  Top Layer w10: U4.7 1475,2425 1500,2450 2050,2450 2100,2500 2100,3800 2400,4100 2400,4200 P1.16
P5.4: P1.19
PWR_EN: P1.34
RTC_ALARM: P1.33
VREF: P1.32
VSSA: P1.31
X0_BI0: P7_BI0.1 U4_I01.2 | length 628
  Top Layer w10: P7_BI0.1 3400,2900 3575,3075 U4_I01.2
X0_BI1: P7_BI1.1 U4_I02.2 | length 607.3
  Top Layer w10: U4_I02.2 6125,2875 6250,3000 P7_BI1.1
X1_BI0: P7_BI0.2 U4_I11.2 | length 607.3
  Top Layer w10: P7_BI0.2 3600,2900 3725,3025 U4_I11.2
X1_BI1: P7_BI1.2 U4_I12.2 | length 628
  Top Layer w10: U4_I12.2 6125,3025 6300,3200 P7_BI1.2
X2_BI0: P7_BI0.3 U4_I21.2 | length 586.6
  Top Layer w10: P7_BI0.3 3800,2900 3875,2975 U4_I21.2
X2_BI1: P7_BI1.3 U4_I22.2 | length 648.7
  Top Layer w10: U4_I22.2 6125,3175 6350,3400 P7_BI1.3
X3_BI0: P7_BI0.4 U4_I31.2 | length 565.9
  Top Layer w10: P7_BI0.4 4000,2900 4025,2925 U4_I31.2
X3_BI1: P7_BI1.4 U4_I32.2 | length 669.4
  Top Layer w10: U4_I32.2 6125,3325 6400,3600 P7_BI1.4
X4_BI0: P8_BI0.1 U4_I41.2 | length 565.9
  Top Layer w10: U4_I41.2 4175,2925 4200,2900 P8_BI0.1
X4_BI1: P8_BI1.1 U4_I42.2 | length 690.1
  Top Layer w10: U4_I42.2 6125,3475 P8_BI1.1
X5_BI0: P8_BI0.2 U4_I51.2 | length 586.6
  Top Layer w10: U4_I51.2 4325,2975 4400,2900 P8_BI0.2
X5_BI1: P8_BI1.2 U4_I52.2 | length 740.1
  Top Layer w10: U4_I52.2 6125,3625 6250,3750 6250,3800 P8_BI1.2
X6_BI0: P8_BI0.3 U4_I61.2 | length 607.3
  Top Layer w10: U4_I61.2 4475,3025 4600,2900 P8_BI0.3
X6_BI1: P8_BI1.3 U4_I62.2 | length 790.1
  Top Layer w10: U4_I62.2 6125,3775 6200,3850 6200,3950 P8_BI1.3
X7_BI0: P8_BI0.4 U4_I71.2 | length 628
  Top Layer w10: U4_I71.2 4625,3075 4800,2900 P8_BI0.4
X7_BI1: P8_BI1.4 U4_I72.2 | length 752.3
  Top Layer w10: U4_I72.2 5975,3925 P8_BI1.4
X_CP+: P3.1 U3.2 | length 1137.6
  Top Layer w10: U3.2 v1(1725,3900)
  Bottom Layer w10: P3.1 1400,4000 1625,4000 v1(1725,3900)
X_CP-: P3.2 U3.3 | length 975.5
  Top Layer w10: U3.3 v1(1675,3850)
  Bottom Layer w10: P3.2 1250,3950 1575,3950 v1(1675,3850)
X_DIR+: P3.3 U3.6 | length 771.9
  Top Layer w10: U3.6 v1(1525,3900)
  Bottom Layer w10: P3.3 1100,3900 v1(1525,3900)
X_DIR-: P3.4 U3.5 | length 751.2
  Top Layer w10: U3.5 v1(1575,3850)
  Bottom Layer w10: P3.4 1050,3850 v1(1575,3850)
Y0: D1_O0.2 F1_O0.2 P9.1 | length 1416.9
  Top Layer w10: F1_O0.2 D1_O0.2
  Bottom Layer w10: F1_O0.2 5750,1700 6150,1700 P9.1
Y1: D1_O1.2 F1_O1.2 P9.2 | length 1354.8
  Top Layer w10: F1_O1.2 D1_O1.2
  Bottom Layer w10: F1_O1.2 5700,1800 6250,1800 P9.2
Y2: D1_O2.2 F1_O2.2 P9.3 | length 1292.6
  Top Layer w10: F1_O2.2 D1_O2.2
  Bottom Layer w10: F1_O2.2 5650,1900 6350,1900 P9.3
Y3: D1_O3.2 F1_O3.2 P9.4 | length 1234.3
  Top Layer w10: F1_O3.2 D1_O3.2
  Bottom Layer w10: F1_O3.2 5600,2000 P9.4
Y4: D1_O4.2 F1_O4.2 P10.1 | length 1251.2
  Top Layer w10: F1_O4.2 D1_O4.2
  Bottom Layer w10: F1_O4.2 5550,2100 6350,2100 P10.1
Y5: D1_O5.2 F1_O5.2 P10.2 | length 1275.7
  Top Layer w10: F1_O5.2 D1_O5.2
  Bottom Layer w10: F1_O5.2 5525,2225 6275,2225 P10.2
Y6: D1_O6.2 F1_O6.2 P10.3 | length 1296.4
  Top Layer w10: F1_O6.2 D1_O6.2
  Bottom Layer w10: F1_O6.2 5500,2350 6200,2350 P10.3
Y7: D1_O7.2 F1_O7.2 P10.4 | length 1313.4
  Top Layer w10: F1_O7.2 D1_O7.2
  Bottom Layer w10: F1_O7.2 6125,2475 P10.4
Y_CP+: P4.1 U3.11 | length 713.4
  Top Layer w10: v1(1525,3400) U3.11
  Bottom Layer w10: P4.1 1200,3400 v1(1525,3400)
Y_CP-: P4.2 U3.10 | length 651.2
  Top Layer w10: v1(1475,3350) U3.10
  Bottom Layer w10: P4.2 1050,3350 v1(1475,3350)
Y_DIR+: P4.3 U3.14 | length 863.4
  Top Layer w10: v1(1675,3400) U3.14
  Bottom Layer w10: P4.3 1100,3300 1500,3300 1600,3400 v1(1675,3400)
Y_DIR-: P4.4 U3.13 | length 925.5
  Top Layer w10: v1(1625,3350) U3.13
  Bottom Layer w10: P4.4 1250,3250 1525,3250 v1(1625,3350)
Z_CP+: P5.1 U4.2 | length 1096.2
  Top Layer w10: U4.2 v1(1725,2400)
  Bottom Layer w10: P5.1 1300,2500 1625,2500 v1(1725,2400)
Z_CP-: P5.2 U4.3 | length 934.1
  Top Layer w10: U4.3 v1(1675,2350)
  Bottom Layer w10: P5.2 1150,2450 1575,2450 v1(1675,2350)
Z_DIR+: P5.3 U4.6 | length 730.5
  Top Layer w10: U4.6 v1(1525,2400)
  Bottom Layer w10: P5.3 v1(1525,2400)
Z_DIR-: P5.4 U4.5 | length 792.6
  Top Layer w10: U4.5 v1(1575,2350)
  Bottom Layer w10: P5.4 1025,2200 1175,2350 v1(1575,2350)
pads on no net: P1.47 P1.48

## Keep-outs
Keep-Out Layer:
  lines w10: 1800,4500 1775,4500 ; 1775,4500 1600,4325 1400,4325 1225,4500 800,4500 800,1300 950,1300 1300,1300 1375,1375 2125,1375 2250,1500 2250,2375 2375,2500 3250,2500 3375,2375 3375,1375 3550,1200 5700,1200 5875,1375 6025,1375 6100,1300 6650,1300 6650,4500 6225,4500 6050,4325 5850,4325 5675,4500 1775,4500

## Text inside footprints (layer, text, board x,y; h text height)
P1: Bottom Overlay "47" at 4130,4130 h36; Bottom Overlay "48" at 4130,4230 h36; Bottom Overlay "1" at 1650,4130 h36; Bottom Overlay "2" at 1650,4230 h36